# EAGLE board zigbit (EAGLE 5.06)
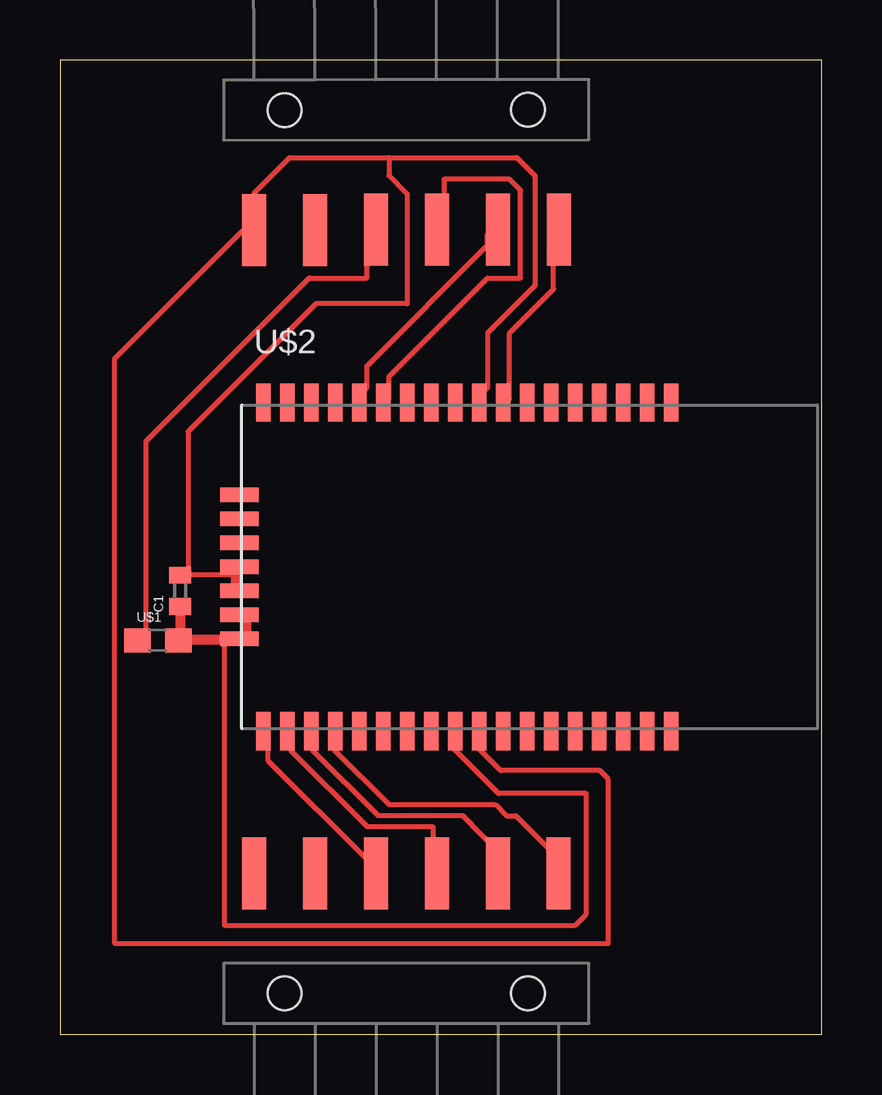
[diagram p0: board, top side]

Size 31.75 x 40.64 mm. Coordinates in mm from the lower left corner, seen from the top.
Outline: 31.75,0 31.75,40.64 0,40.64 0,0 31.75,0
Copper layers (1*16): Top 0.035mm / dielectric 1.5mm / Bottom 0.035mm
Design rules "SparkFun": minimum track width 8mil, minimum drill 20mil, track to track 8mil, track to pad 8mil, pad to pad 8mil, via to via 8mil, smd to smd 8mil, copper to edge 10mil, drill to drill 8mil, minimum pad ring 12mil, minimum via ring 10mil, stop-mask expansion 4mil, vias tented up to drill 25mil, thermal gap 10mil

## Footprints (pad centres in the part's own frame; a part is rotated, then mirrored left to right if it is on the bottom)
C0402 = smd 0.7 x 0.9: 1 -0.65,0; 2 0.65,0
1X06-SMD = smd 1 x 3: 1 -6.35,5; 2 -3.81,5; 3 -1.27,5; 4 1.27,5; 5 3.81,5; 6 6.35,5 | hole 1.4: -5.08,0; 5.08,0
0603 = smd 1.1 x 1: 1 -0.85,0; 2 0.85,0
MNZB-24-A2 = smd 0.6 x 1.6: P$1 8.5,6.85; P$2 7.5,6.85; P$3 6.5,6.85; P$4 5.5,6.85; P$5 4.5,6.85; P$6 3.5,6.85; P$7 2.5,6.85; P$8 1.5,6.85; P$9 0.5,6.85; P$10 -0.5,6.85; P$11 -1.5,6.85; P$12 -2.5,6.85; P$13 -3.5,6.85; P$14 -4.5,6.85; P$15 -5.5,6.85; P$16 -6.5,6.85; P$17 -7.5,6.85; P$18 -8.5,6.85; P$26 -8.5,-6.85; P$27 -7.5,-6.85; P$28 -6.5,-6.85; P$29 -5.5,-6.85; P$30 -4.5,-6.85; P$31 -3.5,-6.85; P$32 -2.5,-6.85; P$33 -1.5,-6.85; P$34 -0.5,-6.85; P$35 0.5,-6.85; P$36 1.5,-6.85; P$37 2.5,-6.85; P$38 3.5,-6.85; P$39 4.5,-6.85; P$40 5.5,-6.85; P$41 6.5,-6.85; P$42 7.5,-6.85; P$43 8.5,-6.85 | smd 1.6 x 0.6: P$19 -9.5,3; P$20 -9.5,2; P$21 -9.5,1; P$22 -9.5,0; P$23 -9.5,-1; P$24 -9.5,-2; P$25 -9.5,-3

## Placement (x,y rotation side)
C1  .1u  [C0402]  5.01,18.51 90 top
JTAG1  0  [1X06-SMD]  14.44,1.73 0 top
SERIAL  0  [1X06-SMD]  14.44,38.56 180.1 top
U$1  FERRITEBEAD  [0603]  4.08,16.45 0 top
U$2  ATZB-24-A2  [MNZB-24-A2]  16.98,19.51 0 top

## Library data of the parts
C1 JTAG1 SERIAL U$1 = SparkFun
U$2 = com-cubic

## Nets
GND: C1.2 SERIAL.6 U$2.P$9 U$2.P$22 U$2.P$23 U$2.P$35
N$2: C1.1 U$1.2 U$2.P$24 U$2.P$25 U$2.P$34
RST: SERIAL.1 U$2.P$8
RXI: SERIAL.2 U$2.P$14
TCK: JTAG1.6 U$2.P$29
TDI: JTAG1.4 U$2.P$27
TDO: JTAG1.5 U$2.P$28
TMS: JTAG1.3 U$2.P$26
TXO: SERIAL.3 U$2.P$13
VCC: SERIAL.4 U$1.1

## Tracks (layer width: path | path; a pad name or v marks a point on that pad's centre or on a via)
GND
  Top 0.203: U$2.P$22 7.32,19.66 7.32,19.2 5.03,19.2 C1.2 5.33,19.05 5.33,25.15 10.67,30.48 14.48,30.48 14.48,35.05 13.72,35.81 13.72,36.58 | 7.32,18.75 U$2.P$23 | 19.05,30.48 17.83,29.26 17.83,26.98 17.37,26.52 U$2.P$9 | 19.05,30.48 19.66,31.09 | SERIAL.6 8.23,33.83 | U$2.P$35 17.53,12.19 17.53,11.85 17.54,11.85 18.37,11.02 22.51,11.02 22.86,10.67 22.86,3.81 2.29,3.81 2.29,28.19 7.62,33.53 SERIAL.6 | SERIAL.6 8.38,34.29 | 19.05,30.48 19.81,31.24 19.81,35.81 19.05,36.58 13.72,36.58 | SERIAL.6 8.1,35.09 9.58,36.57 13.71,36.57 13.72,36.58
  Top 0.406: 7.32,19.2 7.32,18.75
N$2
  Top 0.203: 5.03,17.83 C1.1 | 6.86,16.46 7.32,16.46 U$2.P$25 | 5.03,16.46 U$1.2 | 7.77,17.37 U$2.P$24 | U$2.P$25 7.77,16.46 | 6.86,16.46 6.86,4.57 21.49,4.57 21.95,5.03 21.95,10.06 18.29,10.06 16.46,11.89 16.46,12.34 U$2.P$34 | 6.86,16.46 U$2.P$25
  Top 0.406: 5.03,17.83 5.03,16.46 6.86,16.46 | 7.77,16.46 7.77,17.37
RST
  Top 0.203: U$2.P$8 18.75,26.52 18.75,29.26 20.57,31.09 20.57,33.38 SERIAL.1
RXI
  Top 0.203: U$2.P$14 12.34,26.52 12.8,26.98 12.8,27.89 17.83,32.92 17.83,33.38 SERIAL.2
TCK
  Top 0.203: U$2.P$29 11.43,12.34 11.43,11.89 13.72,9.6 18.15,9.6 18.61,9.14 19.01,9.14 20.74,7.41 20.74,6.78 JTAG1.6 20.57,6.86
TDI
  Top 0.203: U$2.P$27 9.6,12.34 9.6,11.89 12.8,8.69 15.54,8.69 15.54,6.86 JTAG1.4
TDO
  Top 0.203: U$2.P$28 10.52,12.34 10.52,11.89 13.26,9.14 16.79,9.14 17.18,8.75 17.18,8.74 18.66,7.26 18.66,7.14 JTAG1.5
TMS
  Top 0.203: U$2.P$26 8.69,12.34 8.69,11.43 12.8,7.32 12.8,6.86 JTAG1.3
TXO
  Top 0.203: U$2.P$13 13.72,26.52 13.72,27.43 17.83,31.55 19.2,31.55 19.2,35.2 18.75,35.66 16,35.66 16,33.83 SERIAL.3
VCC
  Top 0.203: 3.66,16.46 U$1.1 3.6,16.82 3.6,24.76 10.39,31.55 12.8,31.55 12.8,33.38 SERIAL.4